# EAGLE board avoccado-nora2-test-jig (EAGLE 7.2.0)
Avoccado-avr-yolandi Yolandi is the minified version of Avoccado-avr with less pins broken out and a footprint of less than one square inch for the PCB without peripherals.
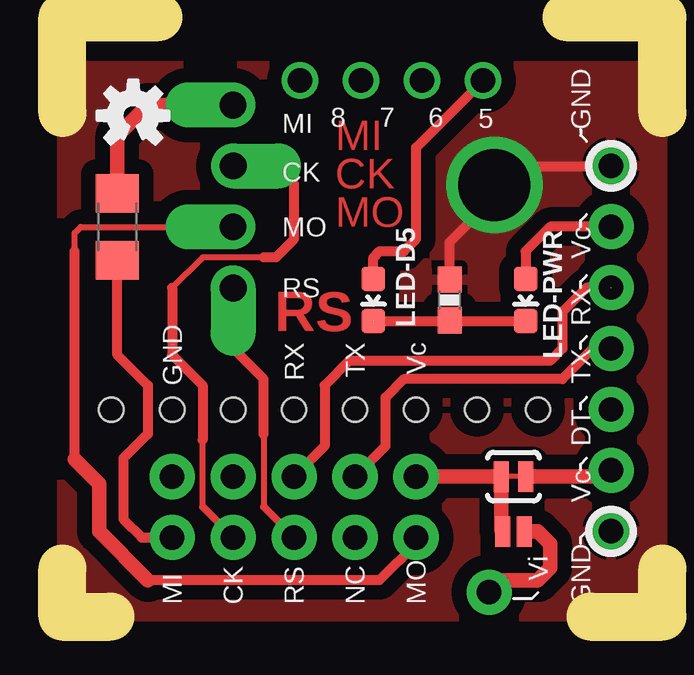
[diagram p0: board, top side]
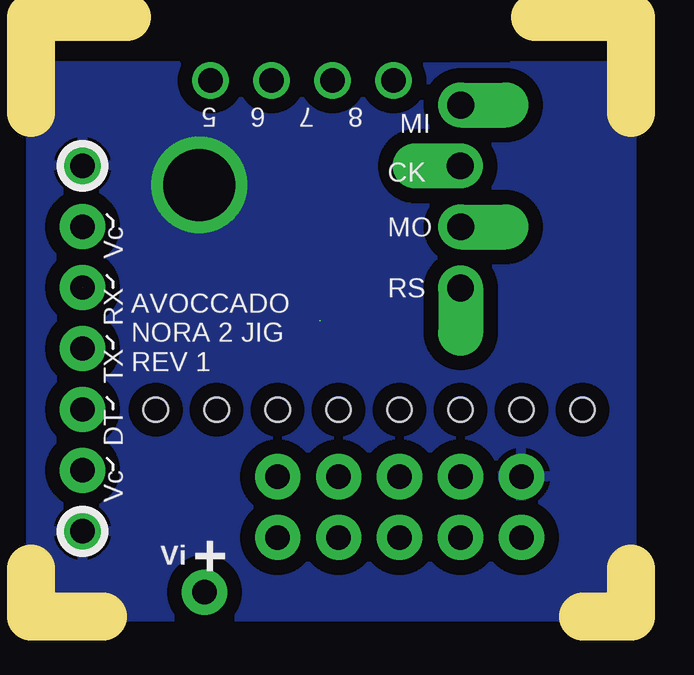
[diagram p1: board, bottom side, seen from below]

No outline drawn. Coordinates in mm, seen from the top.
Copper layers (1*16): Top 0.035mm / dielectric 1.5mm / Bottom 0.035mm
Design rules "dirt_cheap_dirty_boards.v1 *": minimum track width 5mil, minimum drill 12mil, track to track 5mil, track to pad 5mil, pad to pad 5mil, via to via 5mil, smd to smd 0mil, copper to edge 10mil, drill to drill 10mil, minimum pad ring 10mil, minimum via ring 6mil, stop-mask expansion 0mil, vias tented up to drill 25mil, thermal gap 10mil
Net classes: 1 vcc: width 0.254 mm; 3 usbvcc: width 0.203 mm, drill 0.61 mm, clearance 0.152 mm
Holes 1.02 mm at 4.57,8.64 7.11,8.64 9.65,8.64 12.19,8.64 14.73,8.64 17.27,8.64 19.81,8.64 2.03,8.64
tRestrict: area 3,3 to 14.7,7.1; area 7.1,9.1 to 12.7,21.3; area 12.7,19.8 to 14.7,21.3; area 1.5,3.6 to 5.1,15.7
Milling: 8 lines

## Footprints (pad centres in the part's own frame; a part is rotated, then mirrored left to right if it is on the bottom)
2X5_NOSILK = drill 1.016 pad 1.88: 1 -1.27,5.08; 2 1.27,5.08; 3 -1.27,2.54; 4 1.27,2.54; 5 -1.27,0; 6 1.27,0; 7 -1.27,-2.54; 8 1.27,-2.54; 9 -1.27,-5.08; 10 1.27,-5.08
1X01 = drill 1.016 pad 1.88: 1 0,0
1X01_OFFSET = drill 1.118 pad 1.88 offset: 1 0,0
LED-0603 = smd 1 x 1: A 0,-0.877; C 0,0.877
1206 = smd 1.6 x 1.8: 1 -1.4,0; 2 1.4,0
0603-RES = smd 1.1 x 1: 1 -0.85,0; 2 0.85,0
PAD-JUMPER-2-NC_BY_TRACE_YES_SILK = smd 0.635 x 1.27: 1 -0.508,0; 2 0.508,0
PAD-JUMPER-2-NO_NO_SILK = smd 0.635 x 1.27: 1 -0.45,0; 2 0.45,0
1X01NS-KIT = drill 1.016 pad 1.524: 1 0,0

## Placement (x,y rotation side)
ICSP  M05X2NO_SILK  [2X5_NOSILK]  9.65,4.57 90 bottom
JP3  M01PTH  [1X01]  22.86,18.8 0 top
JP6  M01PTH  [1X01]  22.86,3.56 0 top
JP8  M01PTH  [1X01]  22.86,13.72 0 top
JP9  M01PTH  [1X01]  22.86,11.18 0 top
JP10  M01PTH  [1X01]  22.86,8.64 0 top
JP11  M01PTH  [1X01]  22.86,16.26 0 top
JP12  M01OFFSET  [1X01_OFFSET]  7.1,21.34 90 top
JP13  M01OFFSET  [1X01_OFFSET]  7.12,18.8 270 top
JP14  M01OFFSET  [1X01_OFFSET]  7.1,16.26 90 top
JP15  M01OFFSET  [1X01_OFFSET]  7.11,13.71 180 top
JP17  M01PTH  [1X01]  17.78,1.02 0 top
JP18  M01PTH  [1X01]  22.86,6.1 0 top
LED-D5  [LED-0603]  12.95,13.21 180 top
LED-PWR  [LED-0603]  19.3,13.21 180 top
LOGO2  OSHW-LOGOS  [OSHW-LOGO-S]  2.95,20.89 0 top
R1  0  [1206]  2.29,16.26 270 top
R2  1K  [0603-RES]  16.13,13.21 90 top
SJ1  JUMPER-PAD-2-NC_BY_TRACE  [PAD-JUMPER-2-NC_BY_TRACE_YES_SILK]  18.8,5.84 180 top
SJ2  JUMPER-PAD-2-NO  [PAD-JUMPER-2-NO_NO_SILK]  18.8,3.56 180 top
TP1  M01NOSILK-KIT  [1X01NS-KIT]  17.53,22.36 270 top
TP6  M01NOSILK-KIT  [1X01NS-KIT]  14.99,22.36 270 top
TP7  M01NOSILK-KIT  [1X01NS-KIT]  12.45,22.36 270 top
TP8  M01NOSILK-KIT  [1X01NS-KIT]  9.91,22.36 270 top

## Library data of the parts
ICSP JP3 JP6 JP8-JP15 JP17 JP18 TP1 TP6-TP8 = SparkFun-Connectors
LED-D5 LED-PWR = SparkFun-LED
LOGO2 = SparkFun-Aesthetics
R1 SJ1 SJ2 = SparkFun-Passives
R2 = SparkFun-Resistors

## Nets
3.3V: JP18.1 SJ1.1
5V: JP17.1 SJ2.1
D5: LED-D5.A TP1.1
D6: TP6.1
D7: TP7.1
D8: TP8.1
DTR: JP10.1
GND [vcc]: ICSP.10 JP3.1 JP6.1 R2.2
MISO: JP12.1 R1.1
MISO1: ICSP.9 R1.2
MOSI: ICSP.1 JP14.1
N$1: LED-D5.C LED-PWR.C R2.1
N$2: JP11.1 LED-PWR.A
RESET: ICSP.5 JP15.1
RXI: ICSP.6 JP8.1
SCK: ICSP.7 JP13.1
TXO: ICSP.4 JP9.1
VTG: ICSP.2 SJ1.2 SJ2.2

## Tracks (layer width: path | path; a pad name or v marks a point on that pad's centre or on a via)
3.3V
  Top 0.61: SJ1.1 22.6,5.84 JP18.1
5V
  Top 0.61: SJ2.1 19.81,3.56 20.32,3.05 20.32,2.03 19.81,1.52 18.28,1.52 JP17.1
D5
  Top 0.406: LED-D5.A 12.95,14.99 13.21,15.24 14.22,15.24 14.73,15.75 14.73,19.57 TP1.1
GND  (via drill 3 pad 4)
  Top 0.406: R2.2 16.13,15.62 19.3,18.8 JP3.1
  other vias: 18,18
  pour Bottom (isolate 0.61): 0.4,23.02 21,23 22.5,21.5 22.5,1 0.4,1
  pour Top (isolate 0.61): 0,0 0,22.97 25,22.97 25,0
  pour Bottom (isolate 0.61): 25,0 25,22.97 0,22.97 0,0
MISO
  Top 0.61: JP12.1 5.59,21.34 5.08,21.34 3.56,21.34 2.29,20.07 R1.1
MISO1
  Top 0.406: ICSP.9 3.3,3.3 2.54,4.06 2.54,6.6 3.56,7.62 3.56,9.65 2.29,10.92 R1.2
MOSI
  Top 0.254: 5.08,16.26 0.76,16.26 0.51,16 0.51,15.24
  Top 0.406: ICSP.1 14.73,3.05 13.21,1.52 3.56,1.52 | 0.51,6.56 0.51,15.24 | 5.08,16.26 JP14.1
  Top 0.61: 0.51,6.56 1.52,5.54 1.52,3.56 3.56,1.52
N$1  (1 unrouted)
  Top 0.406: 12.98,12.33 R2.1 | LED-D5.C LED-PWR.C
N$2
  Top 0.406: JP11.1 20.33,16.26 19.3,15.24 LED-PWR.A
RESET
  Top 0.254: 8.38,7.62 8.38,4.57
  Top 0.305: JP15.1 | 8.38,4.57 ICSP.5
  Top 0.406: 8.38,7.62 8.38,9.91 7.11,11.18 JP15.1
RXI  (1 unrouted)
  Top 0.406: JP8.1 21.84,13.72 20.83,12.7 20.83,11.18 20.32,10.67 11.94,10.67 10.92,9.65 10.92,7.11 ICSP.6
SCK
  Top 0.254: 5.84,4.57 5.84,7.37 | 8.38,14.99 5.84,14.99 4.57,13.72
  Top 0.305: 5.84,4.57 ICSP.7
  Top 0.406: JP13.1 8.89,18.8 9.65,18.03 9.65,15.75 8.89,14.99 8.38,14.99 | 4.57,13.72 4.57,10.92 5.84,9.65 5.84,7.37
TXO
  Top 0.406: JP9.1 22.1,11.18 20.83,9.91 14.22,9.91 13.46,9.14 13.46,7.11 ICSP.4
VTG
  Top 0.61: SJ2.2 18.29,3.61 SJ1.2 ICSP.2

## Text on the board
Top: MI | CK | MO | RS
tPlace: GND | MI | 8 | 7 | 6 | 5 | CK | MO | Vc | RS | RX | GND | RX | TX | Vc | TX | DT | Vc | Vi | GND | MI | CK | RS | NC | MO
bPlace: MI | 8 | 7 | 6 | 5 | CK | MO | Vc | RS | RX | AVOCCADO / NORA 2 JIG / REV 1 | TX | DT | Vc | + | Vi